# Altium PCB 小键盘 sc_2022-03-27.pcbdoc (part 1 of 2)
Units mil, origin at the board's own origin, x right, y up, seen from the top; angles counter-clockwise.
Board outline 7290 x 4525 mil, 2 copper layers (Top Layer, Bottom Layer); 48 components, 50 nets, 170 pads, 98 vias.
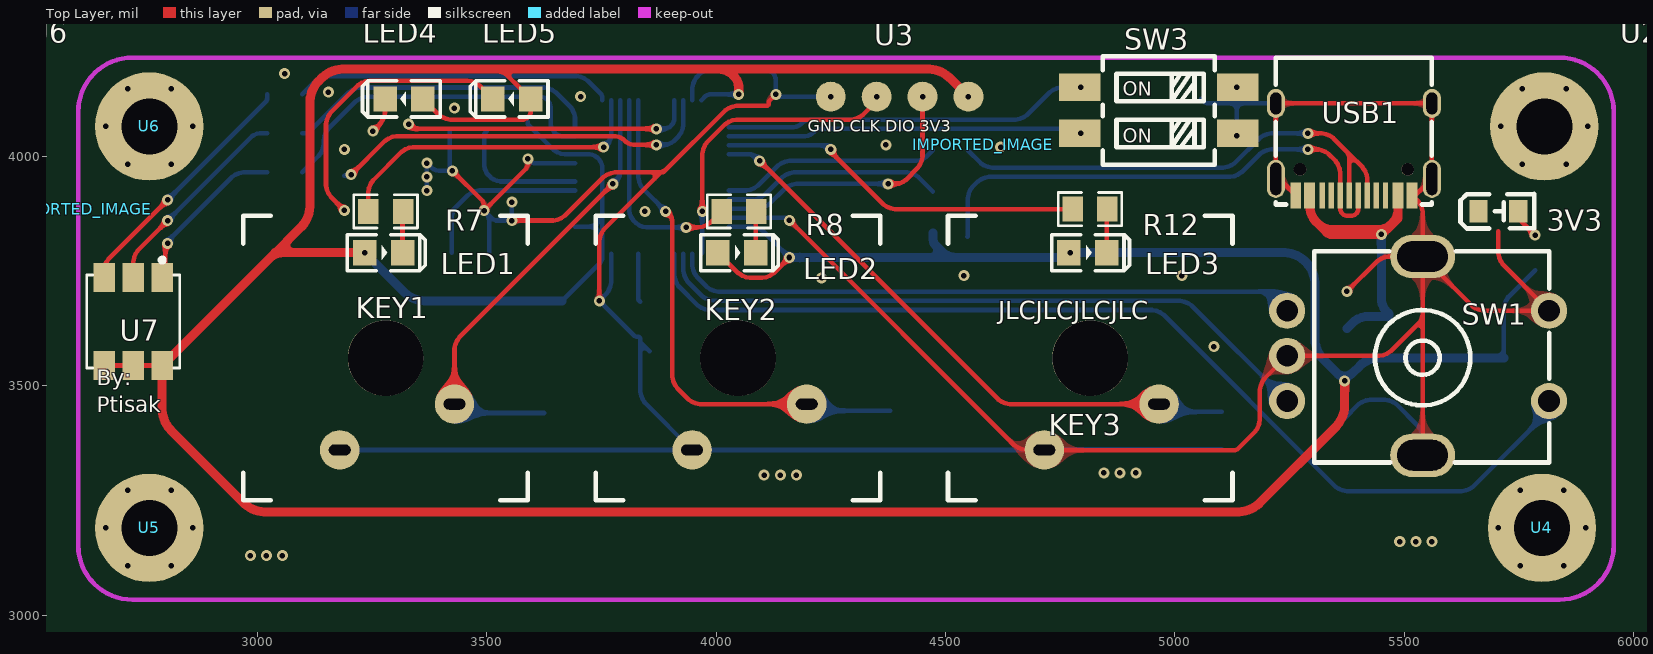
[diagram p0: Top Layer view]
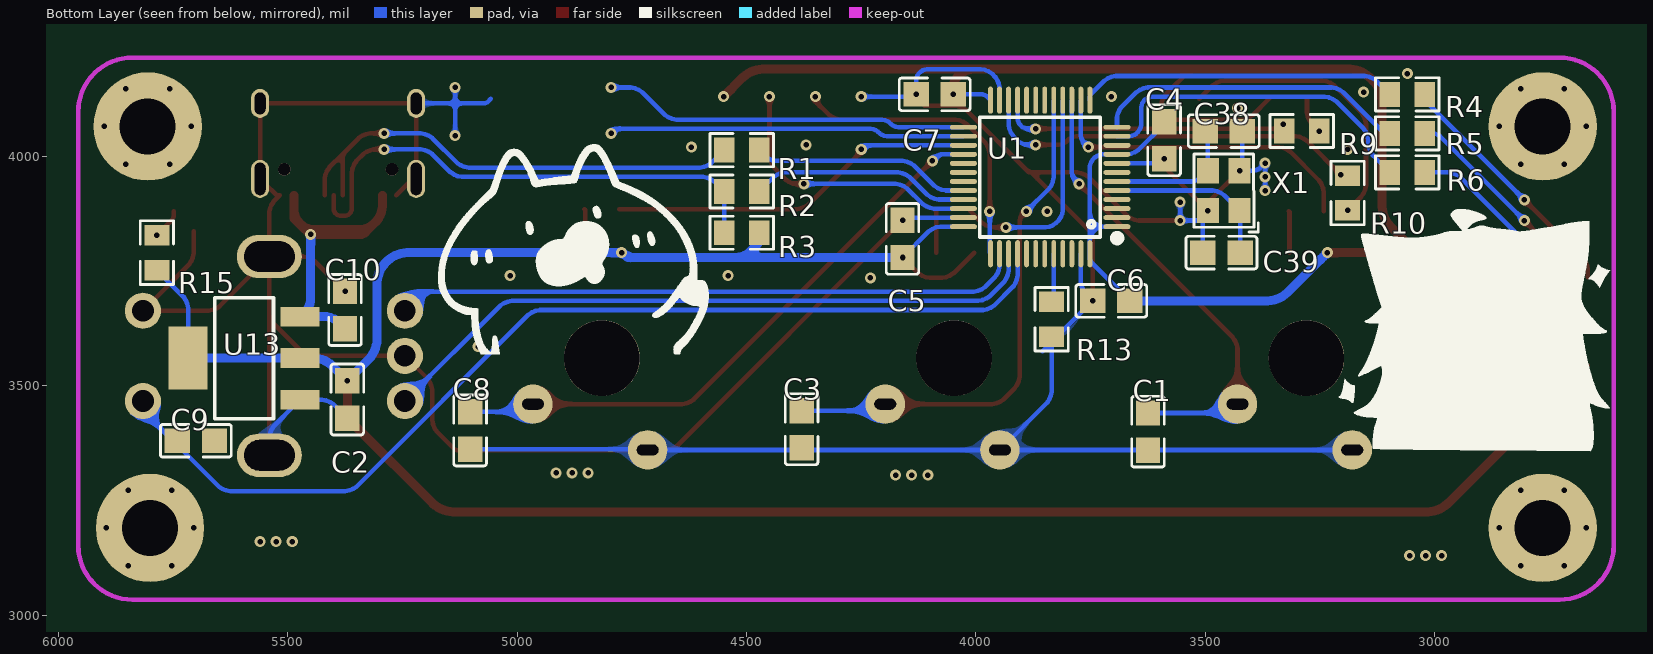
[diagram p1: Bottom Layer view, seen from below]

## Layer stack, top to bottom
Top Layer: signal copper (thickness not stored)
Dielectric: dielectric 12.6, FR-4, Dk 4.8
Bottom Layer: signal copper (thickness not stored)

## Board outline
8290,1000 1000,1000 1000,5525 8290,5525

## Components (designator, comment, footprint, x,y, rotation, side; value= is the part's Value field where it differs from the comment)
3V3 "17-21/BHC-XL2M2TY/3T" LED0805-RD 5705,3880 r0 top
C1 "0.1u" C0805 3625,3400 r90 bottom
C2 "10u" C0805 5370,3470 r270 bottom
C3 "0.1u" C0805 4380,3405 r270 bottom
C4 "0.1u" C0805 3590,4035 r270 bottom
C5 "0.1u" C0805 4160,3820 r90 bottom
C6 "0.1u" C0805 3705,3685 r0 bottom
C7 "0.1u" C0805 4090,4135 r0 bottom
C8 "0.1u" C0805 5102.5,3402.5 r270 bottom
C9 "0.1u" C0805 5700,3380 r180 bottom
C10 "100nF" C0805 5375,3665 r90 bottom
C38 "18pF" C0805 3460,4055 r180 bottom
C39 "18pF" C0805 3465,3790 r0 bottom
IMPORTED_IMAGE "IMPORTED_IMAGE" IMPORTED_IMAGE 2618.16,3884.4 r0 top
IMPORTED_IMAGE "IMPORTED_IMAGE" IMPORTED_IMAGE 4582.61,4025.65 r0 top
KEY1 "机械键盘轴" 机械键盘轴 3280,3560 r0 top
KEY2 "机械键盘轴" 机械键盘轴 4047.72,3560 r0 top
KEY3 "机械键盘轴" 机械键盘轴 4815.43,3560 r0 top
LED1 "LED-0805_R" LED0805_RED 3275.43,3790 r0 top
LED2 "LED-0805_R" LED0805_RED 4045.43,3790 r0 top
LED3 "LED-0805_R" LED0805_RED 4810.43,3790 r0 top
LED4 "LED-0805_R" LED0805_RED 3320,4125 r180 top
LED5 "LED-0805_R" LED0805_RED 3555,4125 r180 top
R1 "22R" R0805#1 4510.55,4013.31 r180 bottom
R2 "22R" R0805#1 4510.55,3923.31 r180 bottom
R3 "1.5K" R0805#1 4510.55,3833.31 r180 bottom
R4 "1k" R0805#1 3060,4135 r180 bottom
R5 "1k" R0805#1 3060,4050 r180 bottom
R6 "1k" R0805#1 3060,3965 r180 bottom
R7 "4.7k" R0805#2 3280,3880 r180 top
R8 "4.7k" R0805#2 4050,3880 r180 top
R9 "4.7k" R0805#1 3290,4055 r180 bottom
R10 "4.7k" R0805#1 3190,3920 r270 bottom
R12 "4.7k" R0805#2 4815,3885 r180 top
R13 "10KΩ" R0805#1 3835,3645 r270 bottom
R15 "4.7k" R0805#1 5785,3790 r90 bottom
SW1 "EC1110120005" SW-TH_EC111XXXX 5530,3565 r270 top
SW3 "DMR-02-T-V" SW-SMD_DMR-02-T-V 4965,4100 r90 top
U1 "STM32F103C8T6" LQFP-48_L7.0-W7.0-P0.50-LS9.0-BL 3860,3955 r270 bottom
U2 "KONG" 洞3MM 5805,4065 r0 top
U3 "贴片排针4P" 贴片排针4P 4550,4130 r180 top
U4 "KONG" 洞3MM 5800,3190 r0 top
U5 "KONG" 洞3MM 2765,3190 r0 top
U6 "KONG" 洞3MM 2765,4065 r0 top
U7 "5050W8D-N-RA80" LED-SMD_6P-L5.0-W5.0-5050W8D-N-RA80 2730,3640 r270 top
U13 "AMS1117-3.3" SOT-223_L6.5-W3.5-P2.30-LS7.0-BR 5595,3560 r0 bottom
USB1 "TYPEC-304-BCP16" USB-C-SMD_TYPEC-304-BCP16 5390,4015 r180 top
X1 "8MHz" OSC-SMD_4P-L3.2-W2.5-BL 3460,3925 r270 bottom

## Footprints (in the part's own frame and the unit in brackets; to place one, negate y for a bottom-side part, rotate by r counter-clockwise, add the part's x,y. Pads: shape width x height; smd on the part's side, far side on the other; paste and mask are expansions set on the pad)
C0805 [mm]
  rect 1.41x1.35 smd: 1(1.03,0) 2(-1.03,0)
  silkscreen extent -1.96,-0.9 1.96,0.9
IMPORTED_IMAGE [mil]
LED0805-RD [mm]
  rect 1x1.25 smd: 1(-1.1,0) 2(1.1,0)
  silkscreen extent -2.1,-0.95 1.98,0.96
LED0805_RED [mil]
  rect 51.2x55.1 smd: 1(-41.35,0) 2(41.35,0)
  silkscreen extent -79,-39 91,39
LED-SMD_6P-L5.0-W5.0-5050W8D-N-RA80 [mm]
  rect 1.6x1.2 smd: 1(-2.438,1.6) 2(-2.438,0) 3(-2.438,-1.6) 4(2.438,-1.6) 5(2.438,0) 6(2.438,1.6)
  silkscreen extent -3.52,-2.58 2.58,2.58
LQFP-48_L7.0-W7.0-P0.50-LS9.0-BL [mm]
  oval 0.27x1.5 smd: 1(2.75,4.25) 2(2.25,4.25) 3(1.75,4.25) 4(1.25,4.25) 5(0.75,4.25) 6(0.25,4.25) 7(-0.25,4.25) 8(-0.75,4.25) 9(-1.25,4.25) 10(-1.75,4.25) 11(-2.25,4.25) 12(-2.75,4.25) 25(-2.75,-4.25) 26(-2.25,-4.25) 27(-1.75,-4.25) 28(-1.25,-4.25) 29(-0.75,-4.25) 30(-0.25,-4.25) 31(0.25,-4.25) 32(0.75,-4.25) 33(1.25,-4.25) 34(1.75,-4.25) 35(2.25,-4.25) 36(2.75,-4.25)
  oval 1.5x0.27 smd: 13(-4.25,2.75) 14(-4.25,2.25) 15(-4.25,1.75) 16(-4.25,1.25) 17(-4.25,0.75) 18(-4.25,0.25) 19(-4.25,-0.25) 20(-4.25,-0.75) 21(-4.25,-1.25) 22(-4.25,-1.75) 23(-4.25,-2.25) 24(-4.25,-2.75) 37(4.25,-2.75) 38(4.25,-2.25) 39(4.25,-1.75) 40(4.25,-1.25) 41(4.25,-0.75) 42(4.25,-0.25) 43(4.25,0.25) 44(4.25,0.75) 45(4.25,1.25) 46(4.25,1.75) 47(4.25,2.25) 48(4.25,2.75)
  silkscreen extent -3.3,-3.34 3.59,4.46
OSC-SMD_4P-L3.2-W2.5-BL [mm]
  rect 1.4x1.2 smd: 1(1.1,0.875) 2(-1.1,0.875) 3(-1.1,-0.875) 4(1.1,-0.875)
  silkscreen extent -2.03,-1.65 2.29,1.9
R0805#1 [mil]
  rect 44.59x54.21 smd: 1(38.04,0) 2(-38.04,0)
  silkscreen extent -69,-36 69,36
R0805#2 [mil]
  rect 44.59x54.21 smd: 1(-38.04,0) 2(38.04,0)
  silkscreen extent -69,-36 69,36
SOT-223_L6.5-W3.5-P2.30-LS7.0-BR [mil]
  rect 85x43 smd: 1(-122,90.5) 2(-122,-0.5) 3(-122,-90.5)
  rect 85x138 smd: 4(122,-0.5)
  silkscreen extent -64,-132 64,132
SW-SMD_DMR-02-T-V [mil]
  rect 60x90 smd: 1(-50,-172.25) 2(50,-172.25) 3(50,172.25) 4(-50,172.25)
  silkscreen extent -118,-122 118,122
SW-TH_EC111XXXX [mm]
  round 2 hole 1.2: A(-2.5,-7.25) B(2.5,-7.25) C(0,-7.25) D(2.5,7.25) E(-2.5,7.25)
  oval 2.4x3.6 hole 1.7 slot 2.8 at 90 deg: E(-5.5,0.25) E(5.5,0.25)
  silkscreen extent -5.8,-5.75 5.9,7.25
USB-C-SMD_TYPEC-304-BCP16 [mm]
  oval 1x2.1 hole 0.6 slot 1.8 at 90 deg: 13(-4.32,1.633) 14(4.32,1.633)
  oval 1x1.6 hole 0.6 slot 1.2 at 90 deg: 15(-4.32,-2.547) 16(4.32,-2.547)
  rect 0.6x1.45 smd: A1B12(-3.225,2.547) A4B9(-2.45,2.547) B1A12(3.22,2.547) B4A9(2.45,2.547)
  rect 0.3x1.45 smd: A5(-1.25,2.547) A6(-0.25,2.547) A7(0.25,2.547) A8(1.25,2.547) B5(1.75,2.547) B6(0.75,2.547) B7(-0.75,2.547) B8(-1.75,2.547)
  round 0.7 hole 0.7 unplated: ""(-2.98,1.103) ""(2.98,1.103)
  silkscreen extent -4.32,-5.08 4.32,3.05
机械键盘轴 [mil]
  round 86 hole 23.62 slot 47.24 at 0 deg: COL(150,-100) ROW(-100,-200)
  round 165 hole 165 unplated: ""(0,0)
  silkscreen extent -310,-310 310,310
洞3MM [mm]
  round 6 hole 3.1: 1(0,0)
贴片排针4P [mm]
  round 1.66 smd: 1(0,0) 2(2.54,0) 3(5.08,0) 4(7.62,0)

## Via types
v1: diameter 24, hole 12, Top Layer to Bottom Layer, tented both sides, 98 vias

## Nets (pads, with @x,y where several pads share a name; then routed paths per layer and width w, separated by ;. In a path a pad name is that pad's centre, name@x,y a point inside that pad or via, vN(x,y) a via of type N, cw(c..) or ccw(c..) an arc to the next point about the centre after c; other vN are vias at no path point)
3V3_2: 3V3.2 R15.1 | length 66.6
  Top Layer w10: 3V3.2@5748.31,3880 5748.31,3868.7 5751.12,3861.92 v1(5785,3828.04)
+5V: C10.2 U13.3 USB1.A4B9 USB1.B4A9 | length 878
  Top Layer w19.68: USB1.B4A9@5293.55,3914.7 5293.5,3890.54 5294,3885.44 5295,3880.41 5296.49,3875.51 5298.45,3870.78 5300.86,3866.26 5303.71,3862 5306.96,3858.04 5325,3840 ; 5311.62,3853.38 ccw(c5343.92,3885.68) 5343.92,3840 ; 5441.29,3840 ccw(c5441.29,3885.17) 5473.23,3853.23 ccw(c5441.29,3885.17) 5486.46,3885.17 ; USB1.A4B9@5486.46,3914.7 5486.46,3866.46 ; 5325,3840 5460,3840 ; 5325,3840 5332.4,3832.6 5338.68,3830 v1(5450,3830) 5460,3840 ; 5460,3840 5461.5,3840 5486.46,3864.96 5486.46,3866.46 ; 5460,3840 5486.46,3866.46
  Bottom Layer w19.68: C10.2@5375,3624.45 5391.12,3640.57 5398.41,3645.44 5406.5,3648.79 5415.09,3650.5 5464.55,3650.5 5467.02,3656.48 5458.77,3664.73 5454.47,3671.16 5451.51,3678.31 5450,3685.9 v1(5450,3830)
D+: R2.2 R3.2 USB1.A6 USB1.B6 | length 1132
  Top Layer w10: v1(5290,4015) 5311.66,4015 5319.82,4013.38 5327.51,4010.19 5334.43,4005.57 5350.1,3989.9 5355.18,3982.29 5358.69,3973.84 5360.47,3964.87 USB1.B6@5360.47,3914.7 ; USB1.B6@5360.47,3914.7 5360.5,3882.99 5362.97,3877.03 5367.53,3872.47 5373.49,3870 5386.4,3870 5392.55,3872.55 5397.25,3877.25 5399.8,3883.4 USB1.A6@5399.85,3914.7
  Bottom Layer w10: R3.2@4548.04,3825 4548.59,3825.55 4548.59,3908.65 4550.38,3917.62 4553.88,3926.07 4558.96,3933.68 4569.91,3944.63 4577.52,3949.71 4585.97,3953.22 4594.94,3955 5120.34,3955 5129.31,3956.78 5137.76,3960.29 5145.37,3965.37 5184.63,4004.63 5192.24,4009.71 5200.69,4013.22 5209.66,4015 v1(5290,4015)
D-: R1.2 USB1.A7 USB1.B7 | length 1128.8
  Top Layer w10: v1(5290,4050) 5320.34,4050 5329.31,4048.22 5337.76,4044.71 5345.37,4039.63 5380.16,4004.84 ; 5371.62,4013.38 cw(c5351.02,3992.77) 5380.16,3992.77 ; USB1.A7@5380.16,3914.7 5380.16,4004.84 ; 5380.16,3982.77 cw(c5389.3,3982.77) 5395.77,3989.23 ; USB1.B7@5419.53,3914.7 5419.53,3950.81 5417.74,3959.78 5414.24,3968.23 5409.16,3975.84 5380.16,4004.84
  Bottom Layer w10: R1.2@4548.59,4013.31 4576.53,3985.37 4584.14,3980.29 4592.59,3976.78 4601.56,3975 5105.34,3975 5114.31,3976.78 5122.76,3980.29 5130.37,3985.37 5184.63,4039.63 5192.24,4044.71 5200.69,4048.22 5209.66,4050 v1(5290,4050)
EC11_A: SW1.A U1.38 | length 1366
  Bottom Layer w10: U1.38@3948.58,3787.68 3948.6,3761.06 3950.39,3752.09 3953.89,3743.64 3958.97,3736.03 3979.63,3715.37 3987.24,3710.29 3995.69,3706.78 4004.66,3705 5188.34,3705 5197.31,3703.22 5205.76,3699.71 5213.37,3694.63 SW1.A@5244.57,3663.43
EC11_B: SW1.B U1.39 | length 1473.3
  Bottom Layer w10: U1.39@3928.9,3787.68 3928.9,3750.76 3930.68,3741.79 3934.19,3733.34 3939.27,3725.73 3969.63,3695.37 3977.24,3690.29 3985.69,3686.78 3994.66,3685 5011.44,3685 5020.41,3683.22 5028.86,3679.72 5036.47,3674.63 SW1.B@5244.57,3466.57
GND: 3V3.1 C1.2 C2.1 C3.1 C4.1 C5.1 C6.1 C7.1 C8.1 C9.1 C10.1 C38.1 C39.1 KEY1.ROW KEY2.ROW KEY3.ROW R13.1 SW1.C SW1.E SW3.1 SW3.2 U1.8 U1.23 U1.35 U1.47 U3.4 U13.1 USB1.13 USB1.14 USB1.15 USB1.16 USB1.A1B12 USB1.B1A12 X1.2 X1.4 | length 9548.7
  Top Layer w10: v1(3425.55,3968.31) 3491.19,3902.67 3494.45,3894.8 3494.45,3886.3 3497.71,3884.95 3586.84,3974.08 3590,3981.71 v1(3590,3994.45) ; v1(3555,3860) 3645.34,3860 3654.31,3861.78 3662.76,3865.29 3670.37,3870.37 3754.63,3954.63 3762.24,3959.71 3770.69,3963.22 3779.66,3965 3880,3965 ; v1(3745.55,3685) 3745.55,3815.89 3747.34,3824.86 3750.84,3833.31 3755.92,3840.92 3880,3965 ; 3857.93,3965 cw(c3857.93,3955.86) 3864.39,3949.39 ; 3872.93,3965 ccw(c3872.93,3994.14) 3893.54,3973.54 ; v1(4130.55,4135) 4115,4119.4 4115,4112.75 4112.25,4110 4044.66,4110 4035.69,4108.22 4027.24,4104.71 4019.63,4099.63 3885,3965 3880,3965 ; v1(4160,3860.55) 4650.18,3370.37 4657.79,3365.29 4666.24,3361.78 4675.21,3360 KEY3.ROW@4715.43,3360 ; KEY3.ROW@4715.98,3359.45 5120,3359.45 5130.69,3359.45 5137.1,3362.11 5174.63,3399.63 5179.71,3407.24 5183.22,3415.69 5185,3424.66 5185,3490.78 5186.78,3499.75 5190.29,3508.2 5195.37,3515.81 SW1.C@5244.57,3565 5445.34,3565 5454.31,3566.78 5462.76,3570.29 5470.37,3575.37 5539.84,3644.84 ; USB1.16@5219.93,4100.29 cw(c5234.93,4100.29) USB1.16@5234.93,4115.29 ; SW1.C@5236.02,3556.46 cw(c5256.63,3535.86) SW1.C@5256.63,3565 ; USB1.B1A12@5263.23,3914.7 5227.21,3950.72 USB1.14@5219.92,3950.72 USB1.16@5219.92,4115.3 5546.4,4115.29 5552.67,4112.69 5557.47,4107.89 5560.07,4101.61 5560.07,3965.38 5558.28,3956.41 5554.78,3947.96 5549.7,3940.35 5524.05,3914.7 USB1.A1B12@5516.97,3914.7 5531.12,3900.55 5535.4,3894.15 5538.34,3887.05 5539.84,3879.5 SW1.E@5539.85,3781.53 ; v1(5375,3705.55) 5440.61,3771.16 5448.22,3776.24 5456.67,3779.74 5465.64,3781.53 SW1.E@5539.85,3781.53 ; 5524.23,3629.23 cw(c5530.7,3622.77) 5539.84,3622.77 ; 5531.3,3636.3 ccw(c5510.7,3656.91) 5539.84,3656.91 ; SW1.E@5539.85,3348.47 5539.84,3644.84 ; SW1.E@5539.84,3759.46 cw(c5548.98,3759.46) SW1.E@5555.45,3765.92 ; SW1.E@5539.84,3766.53 ccw(c5524.84,3766.53) 5524.84,3781.53 ccw(c5524.84,3796.53) SW1.E@5539.84,3796.53 ; SW1.E@5539.84,3793.6 ccw(c5568.98,3793.6) SW1.E@5548.38,3772.99 ; 5705,3836.69 5705,3788.51 5706.78,3779.54 5710.29,3771.09 5715.37,3763.48 5808.36,3670.49 5805.43,3663.42 5672.61,3663.42 5663.64,3665.2 5655.19,3668.71 5647.58,3673.79 SW1.E@5539.85,3781.53 ; 5539.84,3644.84 SW1.E@5539.85,3781.53
  Bottom Layer w10: KEY1.ROW@3180,3360 KEY2.ROW@3947.72,3360 ; v1(3370,3925) v1(3370,3985) 3380.33,3974.67 3385,3971.55 3390.18,3969.41 3395.68,3968.31 v1(3425.55,3968.31) 3419.45,3974.41 C38.1@3419.45,4055 ; v1(3494.45,3881.69) X1.4@3505.55,3870.59 ; X1.4@3497.01,3879.13 cw(c3476.41,3858.52) X1.4@3505.55,3858.52 ; C39.1@3505.55,3790 X1.4@3505.55,3870.59 ; v1(3555,3900) 3555,3873.68 3552.4,3867.4 3547.6,3862.6 3541.32,3860 3520.03,3860 3513.39,3862.75 X1.4@3505.55,3870.59 ; v1(3590,3994.45) 3597.34,3987.11 3603.57,3984.53 U1.8@3692.68,3984.53 ; U1.47@3771.42,3787.68 3771.42,3724.81 3769.72,3716.28 3766.35,3708.13 3761.65,3701.1 3755.22,3694.67 3752.62,3688.4 3752.62,3681.6 3755.22,3675.33 3821.5,3609.05 3826.56,3606.95 3831.66,3606.95 3835,3603.61 R13.1@3835,3595 ; 3835,3572.93 cw(c3844.14,3572.93) 3850.61,3579.39 ; 3855,3575 R13.1@3835,3595 ; KEY2.ROW@3925.65,3360 ccw(c3925.65,3369.14) KEY2.ROW@3932.11,3375.61 ; KEY2.ROW@3939.18,3368.54 ccw(c3959.79,3389.14) KEY2.ROW@3959.79,3360 ; U1.23@3948.58,4122.32 3948.58,4149.34 3950.31,4158.05 3953.71,4166.26 3958.65,4173.65 3964.93,4179.93 3972.32,4184.87 3980.53,4188.27 3989.24,4190 4106.62,4190 4111.75,4188.98 4116.58,4186.98 4120.93,4184.07 4124.62,4180.38 4127.53,4176.03 4129.53,4171.2 4130.55,4166.07 v1(4130.55,4135) 4135.55,4130 v1(4250,4130) ; U1.35@4027.32,3866.42 4154.13,3866.42 v1(4160,3860.55) ; 5057.25,4125 5064.44,4117.81 5070.53,4115.29 5135,4115.29 ; C8.1@5102.5,3361.95 4717.38,3361.95 KEY3.ROW@4715.43,3360 KEY2.ROW@3947.72,3360 ; v1(5135,4045) 5135,4115.29 ; v1(5135,4150) 5135,4115.29 ; USB1.16@5219.92,4115.3 5135,4115.29 ; C2.1@5370,3429.45 5399.68,3459.13 5407.29,3464.21 5415.74,3467.72 5424.71,3469.5 5458.34,3469.5 5467.31,3467.72 5475.76,3464.21 5483.37,3459.13 5529.47,3413.03 5534.55,3405.42 5538.06,3396.97 5539.84,3388 SW1.E@5539.85,3348.47 ; R13.1@3835,3595 3835,3487.38 3836.78,3478.41 3840.29,3469.96 3845.37,3462.35 KEY2.ROW@3947.72,3360 ; 5120,4115.29 cw(c5120,4100.29) 5135,4100.29 cw(c5150,4100.29) 5150,4115.29 cw(c5150,4130.29) 5135,4130.29 cw(c5120,4130.29) 5120,4115.29
  other v1: 2985,3130 3020,3130 3055,3130 5490,3160 5525,3160 5560,3160 4105,3305 4140,3305 4175,3305 4845,3310 4880,3310 4915,3310 5085,3585 4230,3735 4540,3740 5015,3740 3845,3880 3370,3955 3190,4015 4620,4020 4370,4025 3430,4105 3705,4130 3155,4140 3060,4180
KEY3: C9.2 SW1.D U1.40 | length 2264.2
  Bottom Layer w10: U1.40@3909.21,3787.68 3909.2,3740.46 3910.99,3731.49 3914.49,3723.04 3919.57,3715.43 3959.63,3675.37 3967.24,3670.29 3975.69,3666.78 3984.66,3665 4950.34,3665 4959.31,3663.22 4967.76,3659.71 4975.37,3654.63 5349.63,3280.37 5357.24,3275.29 5365.69,3271.78 5374.66,3270 5625.34,3270 5634.31,3271.78 5642.76,3275.29 5650.37,3280.37 5815.4,3445.4 SW1.D@5815.44,3466.57 ; SW1.D@5806.86,3436.86 ccw(c5786.26,3457.47) SW1.D@5815.4,3457.47
LED1_2: LED1.2 R7.1 | length 90.5
  Top Layer w10: LED1.2@3316.78,3790 3316.78,3878.74 R7.1@3318.04,3880
LED4_2: LED4.2 R9.1 | length 79.2
  Top Layer w10: v1(3251.96,4055) 3268.48,4071.52 3273.46,4078.98 3276.9,4087.27 3278.65,4096.07 LED4.2@3278.65,4125
LED5_2: LED5.2 R10.1 | length 625.5
  Top Layer w10: v1(3190,3881.96) 3160.37,3911.63 3155.29,3919.24 3151.78,3927.69 3150,3936.66 3150,4070.34 3151.78,4079.31 3155.29,4087.76 3160.37,4095.37 3219.63,4154.63 3227.24,4159.71 3235.69,4163.22 3244.66,4165 3459.04,4165 3468.01,4163.22 3476.46,4159.71 3484.07,4154.63 LED5.2@3513.7,4125
NRST: U1.7
OSC_IN: C39.2 U1.5 X1.1 | length 400
  Bottom Layer w10: C39.2@3424.45,3790 X1.1@3424.45,3880.59 ; X1.1@3424.45,3868.52 cw(c3453.59,3868.52) X1.1@3432.99,3889.13 ; X1.1@3425.56,3881.69 X1.1@3424.45,3880.59 ; U1.5@3692.68,3925.47 3483.99,3925.47 3475.02,3923.68 3466.57,3920.18 3458.96,3915.1 X1.1@3424.45,3880.59
OSC_OUT: C38.2 U1.6 X1.3 | length 293.8
  Bottom Layer w10: C38.2@3500.55,4055 3494.45,4048.9 3494.45,3980.79 3495.97,3973.15 3498.95,3965.96 3503.27,3959.49 3508.78,3953.98 3515.25,3949.66 3522.44,3946.68 3530.08,3945.16 U1.6@3692.68,3945.16
PA0: U1.10
PA1: R6.2 U1.11 | length 743.4
  Bottom Layer w10: R6.2@3098.04,3965 3134.76,4001.76 3139.78,4009.27 3143.24,4017.62 3145,4026.48 3145,4035.52 3146.76,4044.38 3150.22,4052.73 3155.24,4060.24 3214.63,4119.63 3222.24,4124.71 3230.69,4128.22 3239.66,4130 3616.91,4130 3621.86,4129.02 3626.52,4127.09 3630.72,4124.28 3634.28,4120.72 3637.09,4116.52 3639.02,4111.86 3640,4106.91 3640,4068.84 3641.08,4063.43 3643.19,4058.34 3646.25,4053.75 3650.15,4049.85 3654.74,4046.79 3659.83,4044.68 3665.24,4043.6 U1.11@3692.68,4043.58
PA2: R5.2 U1.12 | length 686.1
  Bottom Layer w10: R5.2@3098.04,4050 3106.88,4050 3112.2,4052.2 3199.63,4139.63 3207.24,4144.71 3215.69,4148.22 3224.66,4150 3625.34,4150 3634.31,4148.22 3642.76,4144.71 3650.37,4139.63 3683.54,4106.46 3688.03,4099.74 3691.12,4092.27 3692.7,4084.34 U1.12@3692.68,4063.27
PA3: R4.2 U1.13 | length 694.3
  Bottom Layer w10: R4.2@3098.04,4135 3127.63,4164.63 3135.24,4169.71 3143.69,4173.22 3152.66,4175 3695.34,4175 3704.31,4173.22 3712.76,4169.71 3720.37,4164.63 3749.68,4135.32 3751.7,4130.44 U1.13@3751.73,4122.32
PA4: R7.2 U1.14 | length 708.6
  Top Layer w10: R7.2@3241.96,3880 3241.96,3922.3 3243.74,3931.27 3247.25,3939.72 3252.33,3947.33 3314.63,4009.63 3322.24,4014.71 3330.69,4018.22 3339.66,4020 v1(3755,4020)
  Bottom Layer w10: v1(3755,4020) 3765.16,4030.16 3768.23,4034.75 3770.34,4039.86 3771.42,4045.27 U1.14@3771.42,4122.32
PA5: C1.1 KEY1.COL U1.15 | length 1034.8
  Top Layer w10: KEY1.COL@3430,3460 3430,3580.34 3431.78,3589.31 3435.29,3597.76 3440.37,3605.37 v1(3775,3940)
  Bottom Layer w10: KEY1.COL@3430,3460 3449.45,3440.55 C1.1@3625,3440.55 ; KEY1.COL@3440.91,3449.09 ccw(c3461.52,3469.69) KEY1.COL@3461.52,3440.55 ; v1(3775,3940) 3784.96,3949.96 3787.97,3954.47 3790.04,3959.47 3791.1,3964.78 U1.15@3791.1,4122.32
PA6: R8.2 U1.16 | length 473.6
  Top Layer w10: v1(3935,3845) 3962.3,3845 3971.27,3846.78 3979.72,3850.29 3987.33,3855.37 R8.2@4011.96,3880
  Bottom Layer w10: U1.16@3810.79,4122.32 3810.79,3882.26 3812.38,3874.27 3815.49,3866.75 3820.02,3859.98 3825.77,3854.23 3832.54,3849.7 3840.06,3846.59 3848.05,3845 v1(3935,3845)
PA7: C3.2 KEY2.COL U1.17 | length 1164
  Top Layer w10: v1(3890,3880) 3899.28,3870.72 3902.09,3866.52 3904.02,3861.86 3905,3856.91 3905,3519.66 3906.78,3510.69 3910.29,3502.24 3915.37,3494.63 3939.63,3470.37 3947.24,3465.29 3955.69,3461.78 3964.66,3460 KEY2.COL@4197.72,3460
  Bottom Layer w10: U1.17@3830.47,4122.32 3830.47,3954.19 3832.26,3945.22 3835.76,3936.77 3840.84,3929.16 v1(3890,3880) ; KEY2.COL@4197.72,3460 4212.17,3445.55 C3.2@4380,3445.55 ; KEY2.COL@4203.63,3454.09 ccw(c4224.24,3474.69) KEY2.COL@4224.24,3445.55
PB0: U1.18
PB1: U1.19
PB2: U1.20
PB8: U1.45
PB9: U1.46
PB10: R9.2 U1.21 | length 635.2
  Top Layer w10: v1(3330,4070) 3337.4,4062.6 3343.68,4060 v1(3870,4060)
  Bottom Layer w10: v1(3870,4060) 3889.78,4060 3898.69,4063.69 3905.52,4070.52 3909.21,4079.43 U1.21@3909.21,4122.32
PB11: R10.2 U1.22 | length 854.9
  Top Layer w10: v1(3205,3960) 3278.58,4033.58 3286.19,4038.66 3294.64,4042.16 3303.61,4043.95 3780.84,4043.95 3787.09,4042.71 3792.97,4040.27 3798.27,4036.73 3802.78,4032.22 3808.08,4028.68 3813.96,4026.24 3820.21,4025 v1(3870,4025)
  Bottom Layer w10: R10.2@3190,3958.04 3203.04,3958.04 v1(3205,3960) ; v1(3870,4025) 3888.57,4025 3895.56,4026.39 3902.15,4029.12 3908.09,4033.09 3918.53,4043.53 3923.61,4051.14 3927.11,4059.59 3928.9,4068.56 U1.22@3928.9,4122.32
PB12: SW3.3 U1.25 | length 797.5
  Bottom Layer w10: U1.25@4027.32,4063.27 4169.25,4063.27 4174.77,4064.37 4179.97,4066.52 4184.65,4069.64 4188.62,4073.62 4193.3,4076.75 4198.5,4078.9 4204.02,4080 4653.09,4080 4662.06,4081.78 4670.51,4085.29 4678.12,4090.37 4727.38,4139.63 4734.99,4144.71 4743.44,4148.22 4752.41,4150 v1(4795,4150)
PB13: SW3.4 U1.26 | length 775.8
  Bottom Layer w10: U1.26@4027.32,4043.58 4194.73,4043.58 4200.14,4044.66 4205.25,4046.77 4209.84,4049.84 4213.74,4053.74 4218.33,4056.81 4223.44,4058.92 4228.85,4060 4781.32,4060 4787.6,4057.4 v1(4795,4050)
PB14: R12.2 U1.27 | length 807.8
  Top Layer w10: v1(4250,4015) 4250,4010 4364.63,3895.37 4372.24,3890.29 4380.69,3886.78 4389.66,3885 R12.2@4776.96,3885
  Bottom Layer w10: U1.27@4027.32,4023.9 4235.63,4023.9 4241.21,4021.59 4247.8,4015 v1(4250,4015)
PB15: C8.2 KEY3.COL U1.28 | length 1327.8
  Top Layer w10: v1(4095,3990) 4614.63,3470.37 4622.24,3465.29 4630.69,3461.78 4639.66,3460 KEY3.COL@4965.43,3460
  Bottom Layer w10: U1.28@4027.32,4004.21 4075.57,4004.21 4084.48,4000.52 v1(4095,3990) ; KEY3.COL@4965.43,3460 4982.38,3443.05 C8.2@5102.5,3443.05 ; KEY3.COL@4973.84,3451.59 ccw(c4994.45,3472.19) KEY3.COL@4994.45,3443.05
R8_1: LED2.2 R8.1 | length 90.5
  Top Layer w10: LED2.2@4086.78,3790 4086.78,3878.74 R8.1@4088.04,3880
R12_1: LED3.2 R12.1 | length 95.5
  Top Layer w10: LED3.2@4851.78,3790 4851.78,3883.74 R12.1@4853.04,3885
R13_2: R13.2 U1.44 | length 106.5
  Bottom Layer w10: U1.44@3830.47,3787.68 3830.47,3687.57 R13.2@3835,3683.04
RX: U1.31
SWCLK: U1.37 U3.3 | length 658.8
  Top Layer w10: v1(3970,3880) 3970,4005.34 3971.78,4014.31 3975.29,4022.76 3980.37,4030.37 4019.63,4069.63 4027.24,4074.71 4035.69,4078.22 4044.66,4080 4295.34,4080 4304.31,4081.78 4312.76,4085.29 4320.37,4090.37 4350,4120 v1(4350,4130)
  Bottom Layer w10: U1.37@3968.27,3787.68 3970,3789.41 v1(3970,3880)
SWDIO: U1.34 U3.2 | length 601.5
  Top Layer w10: v1(4375,3940) 4393.57,3940 4400.56,3941.39 4407.15,3944.12 4413.09,3948.09 4439.63,3974.63 4444.71,3982.24 4448.22,3990.69 4450,3999.66 v1(4450,4130)
  Bottom Layer w10: U1.34@4027.32,3886.1 4091.43,3886.1 4100.41,3887.89 4108.86,3891.39 4116.47,3896.47 4149.63,3929.63 4157.24,3934.71 4165.69,3938.22 4174.66,3940 v1(4375,3940)
TX: U1.30
U1_29: U1.29
U1_41: U1.41
U1_42: U1.42
U1_43: U1.43
U7_1: R6.1 U7.1 | length 363.8
  Top Layer w10: U7.1@2792.99,3735.97 2798.18,3741.16 2800,3745.55 2800,3810 v1(2805,3810)
  Bottom Layer w10: v1(2805,3810) 2805,3815 2944.63,3954.63 2952.24,3959.71 2960.69,3963.22 2969.66,3965 R6.1@3021.96,3965
U7_2: R5.1 U7.2 | length 447.6
  Top Layer w10: U7.2@2730,3735.97 2730,3770.34 2731.78,3779.31 2735.29,3787.76 2740.37,3795.37 v1(2805,3860)
  Bottom Layer w10: v1(2805,3860) 2987.72,4042.72 2993.06,4046.29 2998.99,4048.75 3005.29,4050 R5.1@3021.96,4050
U7_3: R4.1 U7.3 | length 544
  Top Layer w10: U7.3@2667.01,3735.97 2667.01,3755.18 2668.45,3762.42 2671.27,3769.24 2675.37,3775.37 v1(2805,3905)
  Bottom Layer w10: v1(2805,3905) 3019.56,4119.56 3021.96,4125.35 R4.1@3021.96,4135
USBD+: R2.1 U1.33 | length 481.4
  Bottom Layer w10: U1.33@4027.32,3905.79 4081.14,3905.8 4090.11,3907.59 4098.56,3911.09 4106.17,3916.17 4144.63,3954.63 4152.24,3959.71 4160.69,3963.22 4169.66,3965 4416.14,3965 4425.11,3963.22 4433.56,3959.71 4441.17,3954.63 R2.1@4472.5,3923.31
USBD-: R1.1 U1.32 | length 476.2
  Bottom Layer w10: U1.32@4027.32,3925.47 4065.84,3925.5 4074.81,3927.28 4083.26,3930.79 4090.87,3935.87 4134.63,3979.63 4142.24,3984.71 4150.69,3988.22 4159.66,3990 4436.64,3990 4444.33,3991.53 4451.56,3994.53 4458.08,3998.88 R1.1@4472.5,4013.31
VCC: C2.2 C4.2 C5.2 C6.2 C7.2 LED1.1 LED2.1 LED3.1 LED4.1 LED5.1 R3.1 R15.2 U1.1 U1.9 U1.24 U1.36 U1.48 U3.1 U7.4 U7.5 U7.6 U13.2 U13.4 | length 10017.9
  Top Layer w10: U7.4@2667.01,3544.03 U7.6@2792.99,3544.03 ; U7.6@2773.16,3544.03 cw(c2773.16,3529.03) U7.6@2788.16,3529.03 ; LED4.1@3361.35,4125 3395.98,4090.37 3403.59,4085.29 3412.04,4081.78 3421.01,4080 3580.83,4080 3587.95,4082.95 3593.4,4088.4 3596.35,4095.52 3596.35,4112.18 3594.79,4120.02 3591.72,4127.42 3587.28,4134.07 3531.35,4190 ; 3524.12,4185.16 cw(c3524.12,4156.02) 3544.73,4176.62 ; 3551.8,4169.55 cw(c3558.26,4176.02) 3558.26,4185.16 ; LED2.1@4004.08,3790 4048.71,3745.37 4056.32,3740.29 4064.77,3736.78 4073.74,3735 4100.89,3735 4109.86,3736.78 4118.31,3740.29 4125.92,3745.37 v1(4160,3779.45)
  Top Layer w19.68: U7.6@2793,3525.12 cw(c2838.68,3525.12) U7.6@2806.38,3557.42 ; 3025.58,3776.62 cw(c3057.88,3744.32) 3057.88,3790 ; 3067.27,3817.3 ccw(c3078.58,3805.99) 3078.58,3790 ; v1(3234.08,3790) 3040,3790 ; 4004.59,4190 cw(c4004.58,4144.32) 4036.88,4176.62 ; v1(4049.45,4135) 4049.45,4152.98 4048.1,4159.76 4045.46,4166.14 4041.62,4171.88 4023.5,4190 ; v1(4550,4130) 4507.8,4172.2 4502.56,4176.5 4496.93,4180.26 4490.95,4183.46 4484.7,4186.05 4478.22,4188.02 4471.57,4189.34 4464.83,4190 4023.5,4190 ; v1@5370,3510.5 5370,3455.17 5369.34,3448.43 5368.02,3441.78 5366.05,3435.3 5363.46,3429.05 5360.26,3423.07 5356.5,3417.44 5352.2,3412.2 5182.8,3242.8 5177.56,3238.5 5171.93,3234.74 5165.95,3231.54 5159.7,3228.95 5153.22,3226.99 5146.57,3225.66 5139.83,3225 3015.17,3225 3008.43,3225.66 3001.78,3226.99 2995.3,3228.95 2989.05,3231.54 2983.07,3234.74 2977.44,3238.5 2972.2,3242.8 2810.8,3404.2 2806.5,3409.44 2802.74,3415.07 2799.54,3421.05 2796.95,3427.3 2794.99,3433.78 2793.66,3440.43 2793,3447.17 U7.6@2792.99,3544.03 3038.96,3790 3040,3790 ; 3040,3790 3097.2,3847.2 3101.5,3852.44 3105.26,3858.07 3108.46,3864.05 3111.05,3870.3 3113.01,3876.78 3114.34,3883.43 3115,3890.17 3115,4119.83 3115.66,4126.57 3116.99,4133.22 3118.95,4139.7 3121.54,4145.95 3124.74,4151.93 3128.5,4157.56 3132.8,4162.8 3142.2,4172.2 3147.44,4176.5 3153.07,4180.26 3159.05,4183.46 3165.3,4186.05 3171.78,4188.02 3178.43,4189.34 3185.17,4190 4023.5,4190
  Bottom Layer w10: C4.2@3590,4075.5 3590,4070 3645.86,4014.14 3653.15,4009.27 3661.26,4005.91 3669.86,4004.2 U1.9@3692.68,4004.21 3724.77,4004.2 3730.54,4003.05 3735.98,4000.8 3740.87,3997.53 3745.03,3993.37 3748.3,3988.48 3750.55,3983.04 3751.7,3977.27 3751.7,3865.16 ; C6.2@3664.45,3685 3748.9,3769.45 3751.73,3776.28 U1.48@3751.73,3787.68 3751.73,3828.27 ; U1.1@3692.68,3846.73 3733.27,3846.73 ; 3741.81,3838.19 ccw(c3721.2,3817.59) 3721.2,3846.73 ccw(c3721.2,3875.87) 3741.81,3855.27 ; U1.48@3751.73,3787.68 3751.7,3828.3 ; U1.48@3751.7,3816.23 ccw(c3722.56,3816.23) 3743.16,3836.84 cw(c3753.06,3846.73) 3743.16,3856.62 ccw(c3722.56,3877.23) 3751.7,3877.23 ; 3751.73,3865.19 3751.73,3869.01 ; U1.24@3968.27,4122.32 3977.66,4131.7 3985.61,4135 v1(4049.45,4135) ; U1.36@4027.32,3846.73 4078.06,3846.73 4087.03,3844.95 4095.48,3841.44 4103.09,3836.36 v1(4160,3779.45) ; U13.4@5702,3565.34 ccw(c5702,3580.34) U13.4@5717,3580.34 ; U13.4@5717,3560.5 5717,3669.3 5718.78,3678.27 5722.29,3686.72 5727.37,3694.33 R15.2@5785,3751.96 ; 3733.27,3846.73 3751.7,3828.3 ; 3733.27,3846.73 3751.7,3865.16 ; 3751.7,3828.3 3751.7,3865.16
  Bottom Layer w19.68: v1(3234.08,3790) 3321.28,3702.8 3326.52,3698.5 3332.15,3694.74 3338.12,3691.54 3344.38,3688.95 3350.86,3686.99 3357.51,3685.66 3364.25,3685 C6.2@3664.45,3685 ; v1(4160,3779.45) 4504.64,3779.45 ; 4467.47,3779.45 ccw(c4467.47,3794.85) 4478.35,3805.73 ; R3.1@4472.5,3833.31 4472.5,3819.87 4473.51,3814.8 4475.48,3810.03 4478.35,3805.73 ; 4491.26,3792.83 ccw(c4523.56,3825.12) 4523.56,3779.45 ; 4743.61,3779.45 ccw(c4743.61,3815.47) 4769.08,3790 4758.53,3779.45 ; v1(4772.12,3790) 5240.07,3790 5246.75,3789.34 5253.33,3788.03 5259.75,3786.09 5265.95,3783.52 5271.86,3780.36 5277.44,3776.63 5282.63,3772.37 5287.37,3767.63 5291.63,3762.44 5295.36,3756.86 5298.52,3750.95 5301.09,3744.75 5303.03,3738.33 5304.34,3731.75 5305,3725.07 5305,3600.72 5305.66,3593.98 5306.98,3587.33 5308.95,3580.85 5311.54,3574.59 5314.74,3568.62 5318.5,3562.99 5322.8,3557.75 5353.85,3526.7 5358,3523.93 5362.61,3522.02 5367.5,3521.05 5372.5,3521.05 5377.39,3522.02 5382,3523.93 5386.15,3526.7 5403.42,3543.97 5408.28,3547.96 5413.51,3551.46 5419.06,3554.42 5424.88,3556.83 5430.9,3558.66 5437.07,3559.88 5443.33,3560.5 U13.2@5473,3560.5 U13.4@5717,3560.5 ; v1@4784,3790 ccw(c4784,3753.98) 4758.53,3779.45 ; 4478.35,3805.73 4504.64,3779.45 ; 4504.64,3779.45 4758.53,3779.45
  other v1: 5370,3510.55
pads on no net: KEY1. KEY2. KEY3. U1.2 U1.3 U1.4 U2.1 U4.1 U5.1 U6.1 USB1. USB1.A5 USB1.A8 USB1.B5 USB1.B8